# EAGLE board flex_probe_panel (EAGLE 9.5.2)
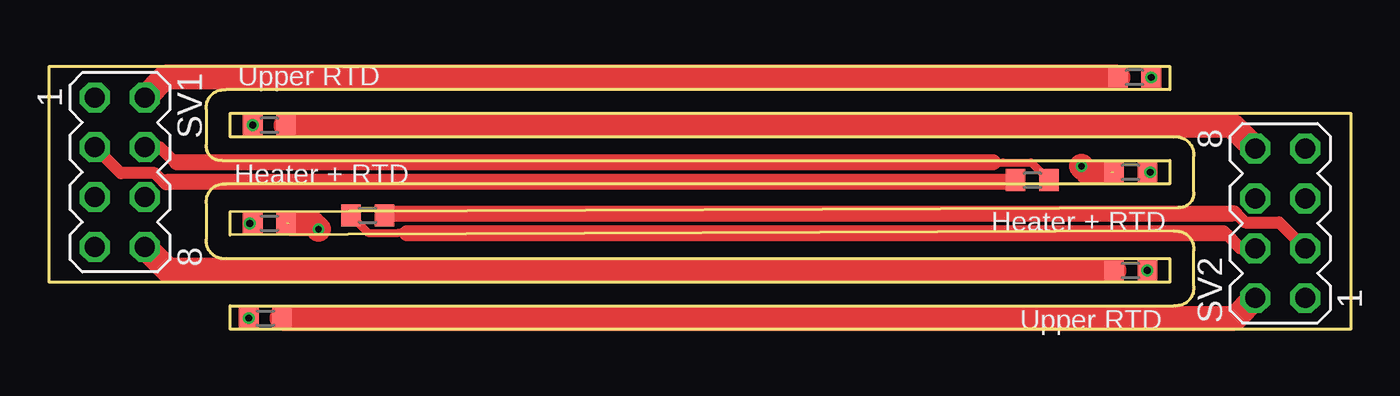
[diagram p0: board, top side]
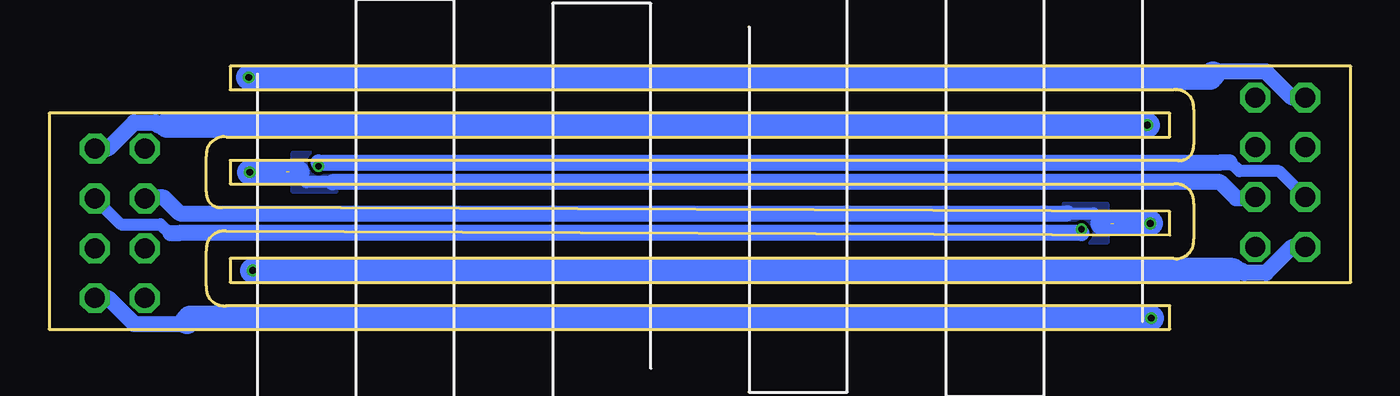
[diagram p1: board, bottom side, seen from below]

Size 66.2 x 13.4 mm. Coordinates in mm from the lower left corner, seen from the top.
Outline: 0,13.4 57,13.4 57,12.2 9,12.2 arc103 8,11.2 8,9.4 arc103 8.8,8.6 57,8.6 57,7.4 9,7.4 arc103 8,6.4 8,4.6 arc103 9,3.6 57,3.6 57,2.4 0,2.4 0,13.4
Outline: 66.2,0 9.2,0 9.2,1.2 57.2,1.2 arc103 58.2,2.2 58.2,4 arc103 57.2,5 9.2,4.8 9.2,6 57.4,6.2 arc103 58.2,7 58.2,8.8 arc103 57.2,9.8 9.2,9.8 9.2,11 66.2,11 66.2,0
Copper layers (1*16): Top 0.035559375mm / dielectric 1.6mm / Bottom 0.035559375mm
Design rules "oshpark-2layer *": minimum track width 6mil, minimum drill 10mil, track to track 6mil, track to pad 6mil, pad to pad 6mil, via to via 6mil, smd to smd 6mil, copper to edge 0mil, drill to drill 6mil, minimum pad ring 5mil, minimum via ring 5mil, stop-mask expansion 2.5mil, vias tented up to drill 0mil, thermal gap 10mil

## Footprints (pad centres in the part's own frame; a part is rotated, then mirrored left to right if it is on the bottom)
R0603 = smd 1 x 1.1: 1 -0.85,0; 2 0.85,0
MA04-2 = drill 1.016 octagon: 1 -3.81,-1.27; 2 -3.81,1.27; 3 -1.27,-1.27; 4 -1.27,1.27; 5 1.27,-1.27; 6 1.27,1.27; 7 3.81,-1.27; 8 3.81,1.27

## Placement (x,y rotation side)
R1  RTD  [R0603]  55.2,12.83 180 top
R2  RTD  [R0603]  50,7.6 0 top
R3  100  [R0603]  55,8 0 top
R4  RTD  [R0603]  55,3 180 top
R5  RTD  [R0603]  11,0.57 0 top
R6  RTD  [R0603]  16.2,5.8 180 top
R7  100  [R0603]  11.2,5.4 180 top
R8  RTD  [R0603]  11.2,10.4 0 top
SV1  [MA04-2]  3.6,8 270 top
SV2  [MA04-2]  62.6,5.4 90 top

## Library data of the parts
R1-R8 = resistor
SV1 SV2 = con-lstb; OC_FARNELL: unknown; OC_NEWARK: unknown

## Nets
N$1: R1.2 SV1.2
N$2: R1.1 SV1.1
N$3: R2.2 SV1.4
N$4: R2.1 SV1.3
N$5: R6.2 SV2.4
N$6: R6.1 SV2.3
N$7: R4.1 SV1.7
N$8: R3.2 SV1.6
N$9: R3.1 SV1.5
N$10: R8.1 SV2.7
N$11: R4.2 SV1.8
N$12: R7.2 SV2.6
N$13: R7.1 SV2.5
N$14: R5.2 SV2.2
N$15: R5.1 SV2.1
N$16: R8.2 SV2.8

## Tracks (layer width: path | path; a pad name or v marks a point on that pad's centre or on a via)
N$1
  Top 1.27: R1.2 5.89,12.83 SV1.2
N$2  (via drill 0.35)
  Bottom 0.813: SV1.1 3,11.81 4.32,13.13 6.87,13.13 7,13
  Bottom 1.27: R1.1 7.17,12.83 7,13
  other vias: 56.05,12.83
N$3
  Top 0.406: R2.2 49.94,8.51 48.5,8.51 48.5,8.5 48,8.5
  Top 0.61: 6.5,8.5 6.4,8.5 5.63,9.27 SV1.4
  Top 0.813: 48,8.5 6.5,8.5
N$4
  Top 0.61: 5.97,7.5 5.82,7.5 5.38,7.95 3.65,7.95 SV1.3
  Top 0.813: R2.1 49.05,7.5 5.97,7.5
N$5
  Top 0.406: R6.2 16.26,4.89 17.7,4.89 17.7,4.9 18.2,4.9
  Top 0.61: 59.7,4.9 59.8,4.9 60.57,4.13 SV2.4
  Top 0.813: 18.2,4.9 59.7,4.9
N$6
  Top 0.61: 60.23,5.9 60.38,5.9 60.83,5.45 62.55,5.45 SV2.3
  Top 0.813: R6.1 17.15,5.9 60.23,5.9
N$7  (via drill 0.35)
  Bottom 0.813: SV1.7 3,4.19 4.32,2.87 5.42,2.87 5.55,3 6,3
  Bottom 1.27: 6,3 R4.1
  other vias: 55.85,3
N$8  (via drill 0.35)
  Top 0.406: R3.2 v56,8
  Bottom 0.61: 51.8,7.5 53.1,7.5 53.6,8
  Bottom 0.813: 51.8,7.5 6.65,7.5 5.83,6.69 4.91,6.69 SV1.6
  Bottom 1.27: 53.6,8 v56,8
  pour Bottom: 51.6,9 51.6,7 53.8,7 53.8,9
N$9  (via drill 0.35)  (1 unrouted)
  Top 1.27: v52.5,8.3 52.8,8 54,8
  Bottom 0.254: v52.5,8.3 52.5,8.5
  Bottom 0.305: v52.5,8.3 52.4,8.4
  Bottom 0.61: 6.6,8.5 6.12,8.5 5.67,8.05 3.65,8.05 SV1.5
  Bottom 0.813: 6.18,8.5 6.6,8.5 52.5,8.5
N$10  (via drill 0.35)
  Bottom 0.813: SV2.7 63.2,9.21 61.88,10.53 60.78,10.53 60.65,10.4 60.2,10.4
  Bottom 1.27: 60.2,10.4 R8.1
  other vias: 10.35,10.4
N$11
  Top 1.27: R4.2 6.06,3 SV1.8
N$12  (via drill 0.35)
  Top 0.406: R7.2 v10.2,5.4
  Bottom 0.61: 14.4,5.9 13.1,5.9 12.6,5.4
  Bottom 0.813: 14.4,5.9 59.55,5.9 60.37,6.71 61.29,6.71 SV2.6
  Bottom 1.27: 12.6,5.4 v10.2,5.4
  pour Bottom: 14.6,4.4 14.6,6.4 12.4,6.4 12.4,4.4
N$13  (via drill 0.35)  (1 unrouted)
  Top 1.27: v13.7,5.1 13.4,5.4 12.2,5.4
  Bottom 0.254: v13.7,5.1 13.7,4.9
  Bottom 0.305: v13.7,5.1 13.8,5
  Bottom 0.61: 59.6,4.9 60.08,4.9 60.53,5.35 62.55,5.35 SV2.5
  Bottom 0.813: 60.02,4.9 59.6,4.9 13.7,4.9
N$14
  Top 1.27: R5.2 60.31,0.57 SV2.2
N$15  (via drill 0.35)
  Bottom 0.813: SV2.1 63.2,1.59 61.88,0.27 59.33,0.27 59.2,0.4
  Bottom 1.27: R5.1 59.03,0.57 59.2,0.4
  other vias: 10.15,0.57
N$16
  Top 1.27: R8.2 60.14,10.4 SV2.8

## Text on the board
tNames: Upper RTD | Heater + RTD | Heater + RTD | Upper RTD
tDocu: Lower RTD | Lower RTD